# Altium PCB CX1086_PCB1.PcbDoc
Units mil, origin at the board's own origin, x right, y up, seen from the top; angles counter-clockwise.
Board outline 2746.03 x 2461.03 mil, 2 copper layers (Top Layer, Bottom Layer); 10 components, 9 nets, 30 pads, 0 vias.
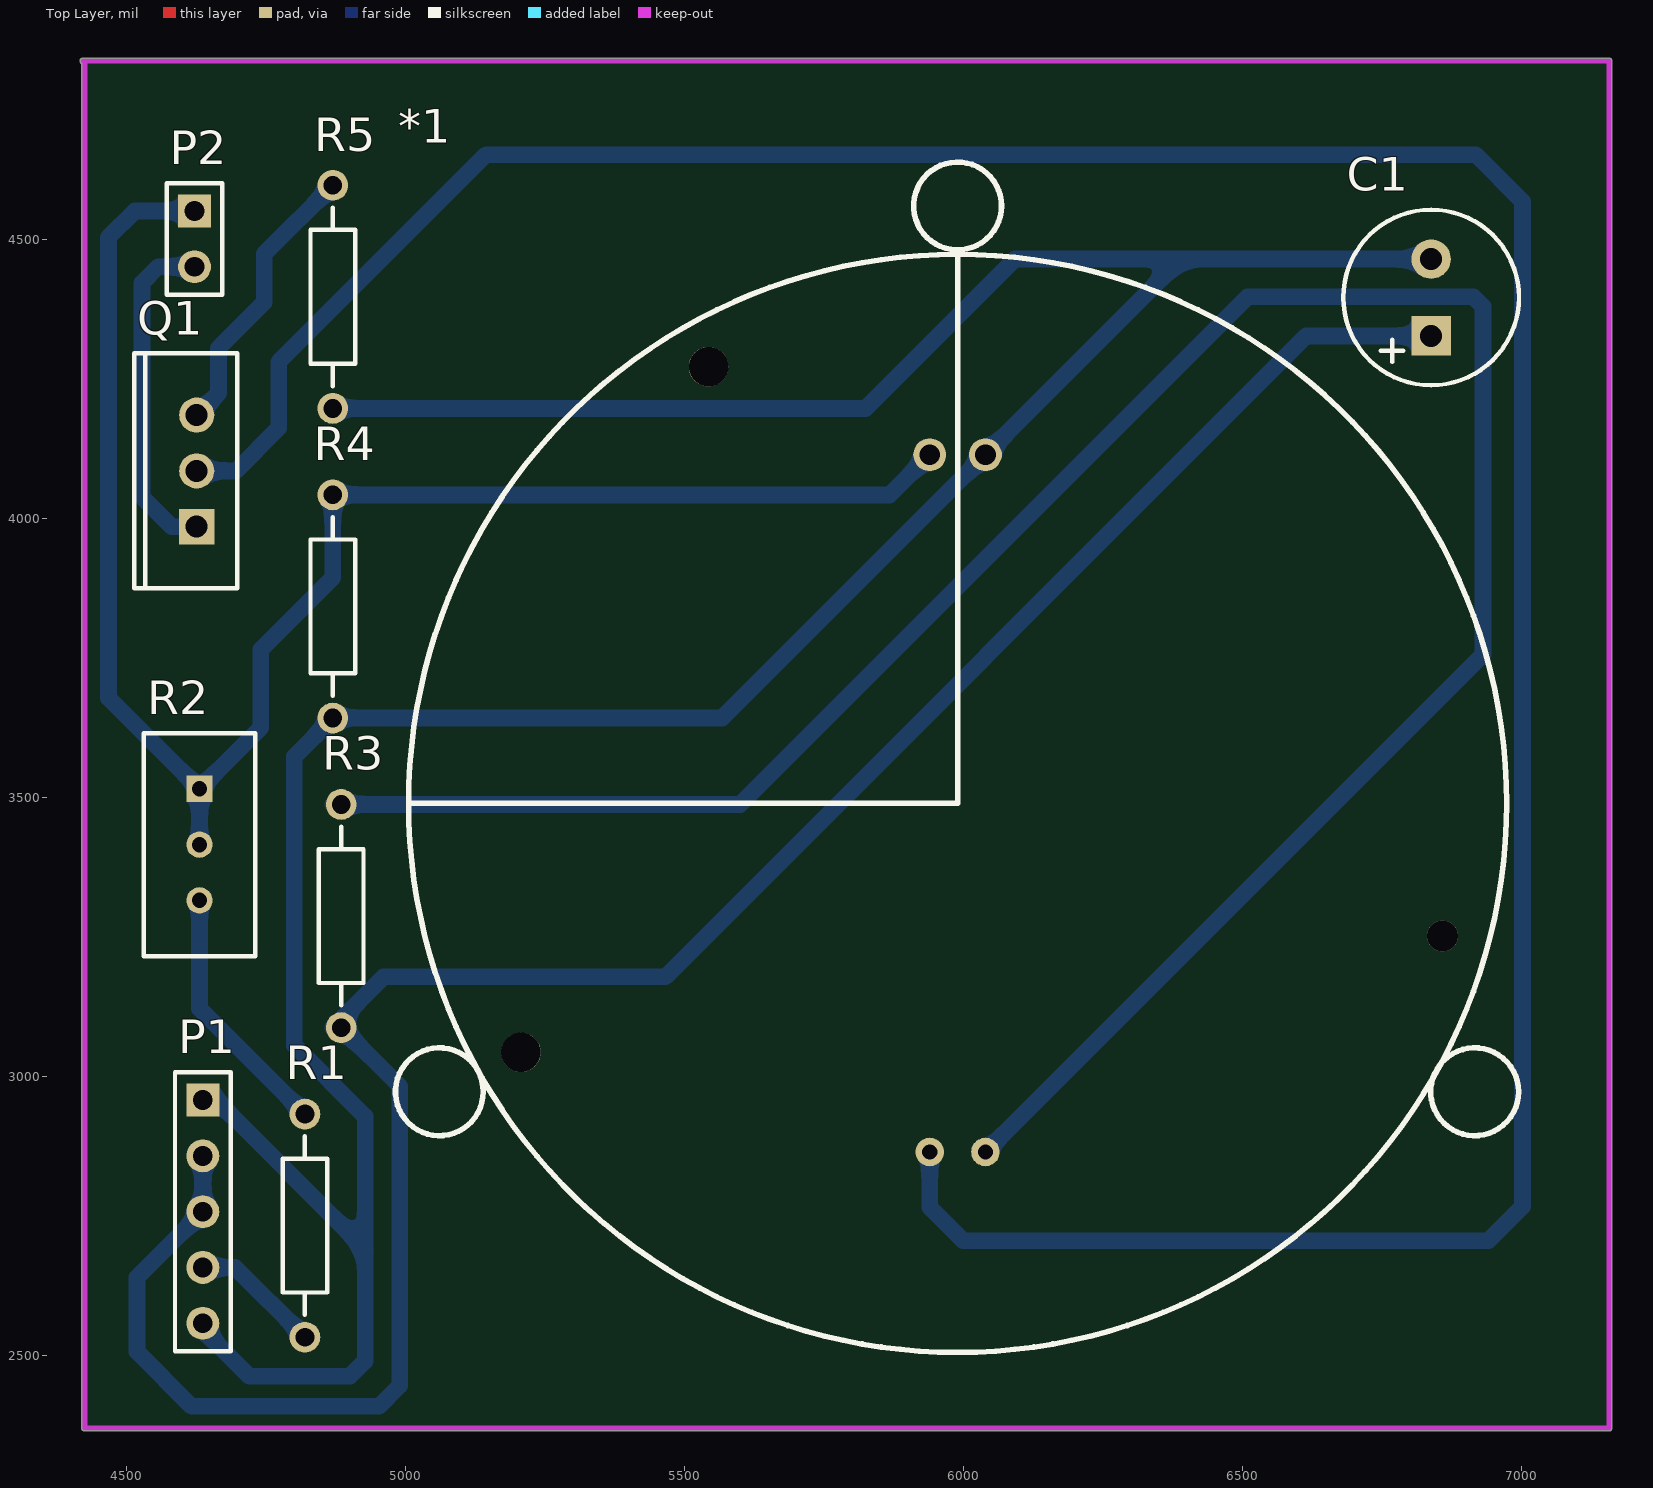
[diagram p0: Top Layer view]
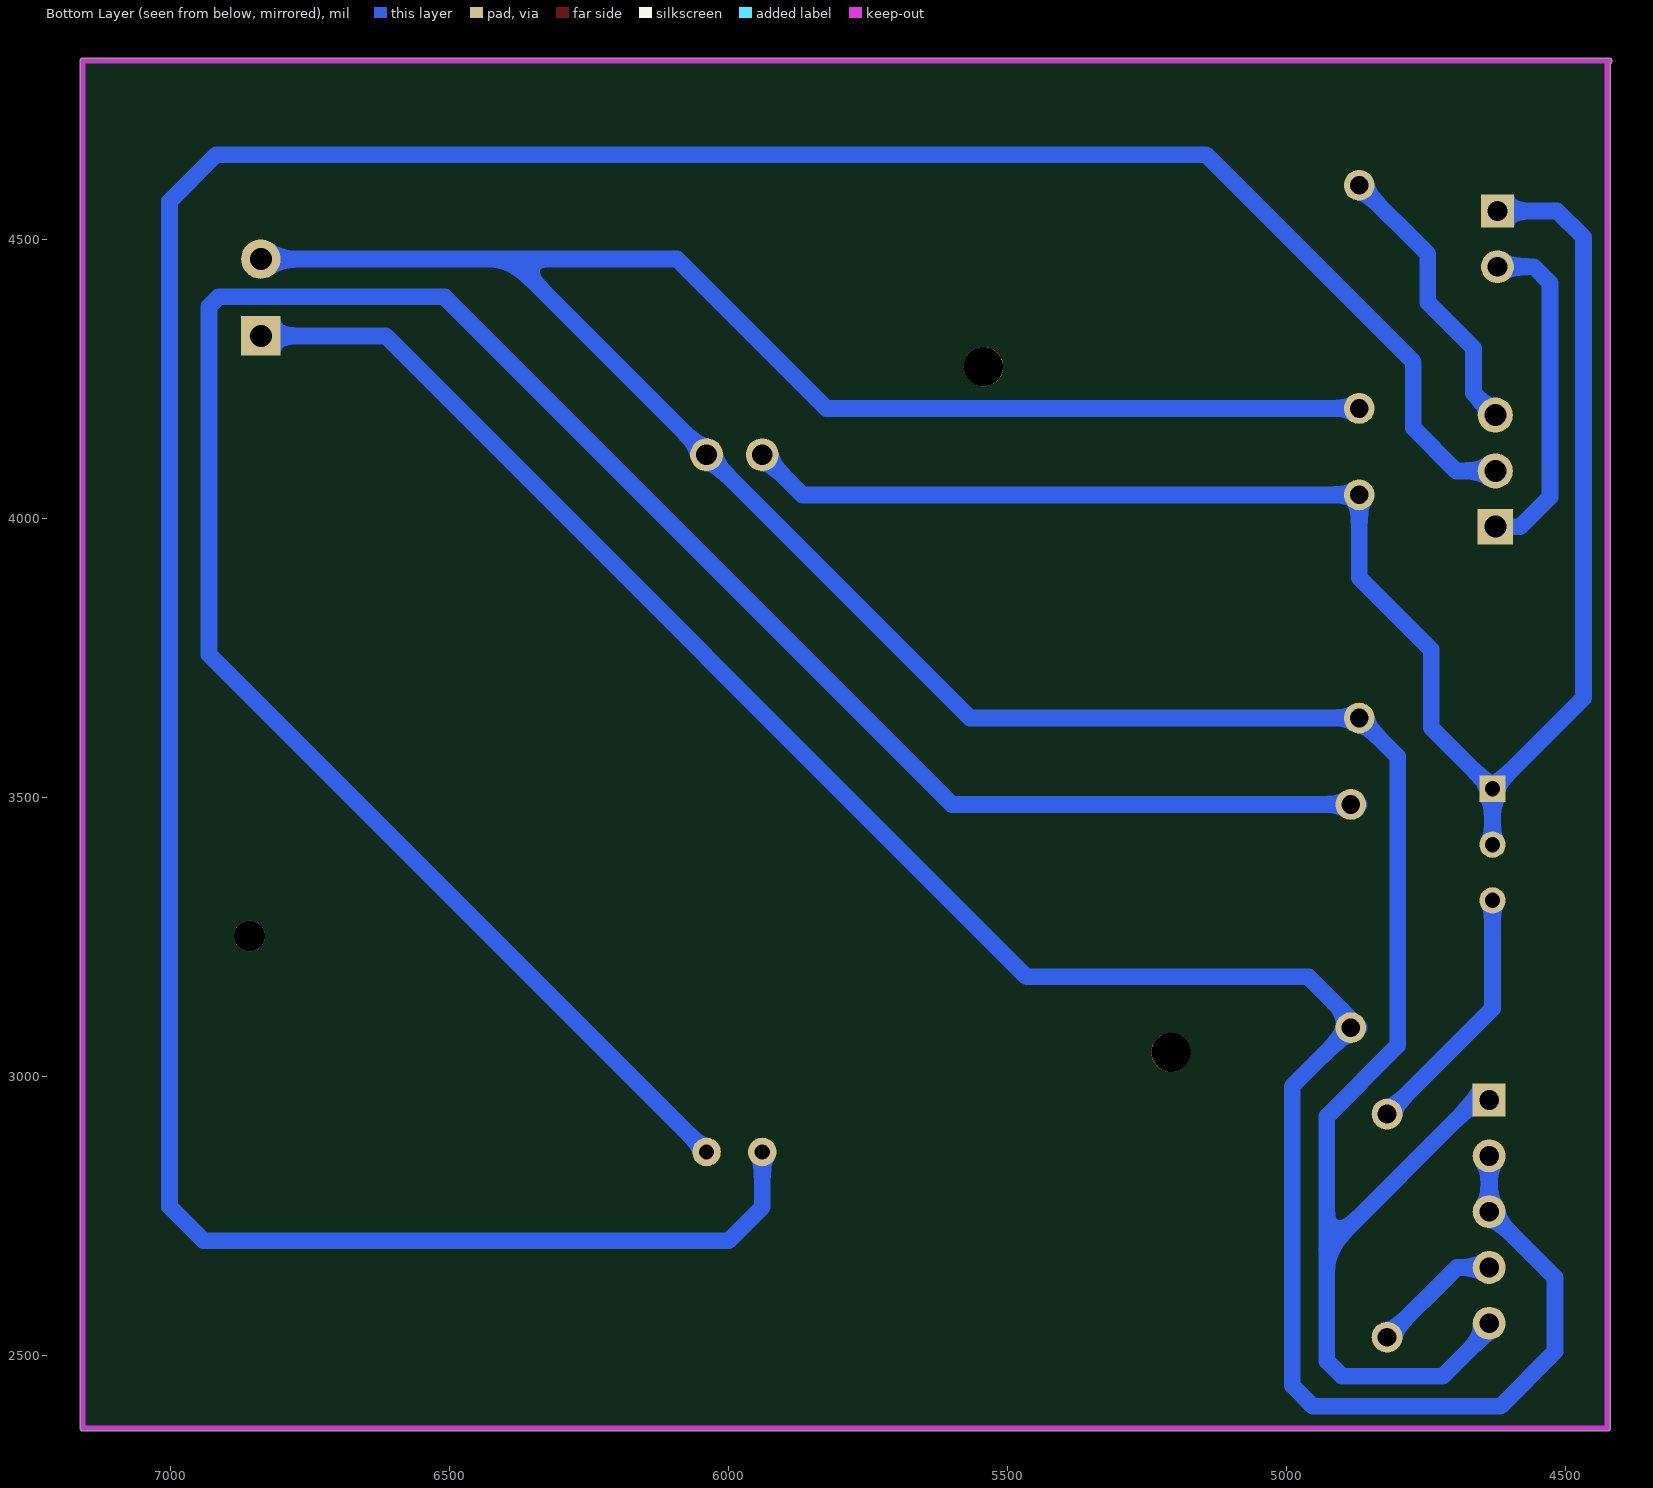
[diagram p1: Bottom Layer view, seen from below]

## Layer stack, top to bottom
Top Solder: solder mask 0.4, Solder Resist, Dk 3.5
Top Layer: signal copper 1.4
Dielectric 1: dielectric 12.6, FR-4, Dk 4.8
Bottom Layer: signal copper 1.4
Bottom Solder: solder mask 0.4, Solder Resist, Dk 3.5

## Board outline
4418.98,2369 4418.98,4815.41 cw(c4421,4820) 4421,4825.02 7157,4825.02 cw(c7157,4820) 7162.02,4820 7162.02,2369 cw(c7157,2369) 7157,2363.99 4424,2363.99 cw(c4424,2369)

## Design rules (kind name [scope] priority, off if disabled: settings)
Clearance [All] p1: gap=10
ComponentClearance [All] p1: gap=0 collisioncheckmode=3 verticalgap=0 showdistances=TRUE
PolygonConnect [All] p1: connectstyle=Relief reliefconductorwidth=10 reliefentries=4 polygonreliefangle="90 Angle" airgapwidth=10
RoutingVias [All] p1: holewidth=28 width=50 viastyle="Through Hole" minholewidth=28 minwidth=50 maxholewidth=28 maxwidth=50
SolderMaskExpansion [All] p1: expansion=4
Width [All] p1: maxlimit=100 minlimit=10 preferedwidth=20
29 further rules are at their usual default settings.

## Components (designator, comment, footprint, x,y, rotation, side; value= is the part's Value field where it differs from the comment)
*1 "CX-1088" CX-1088 5060,2972 r90 top
C1 "Cap Pol" C-RB-8 6838,4327 r90 top
P1 "Header 5" HDR1X5 4636,2957 r270 top
P2 "Header 2" HDR1X2 4621,4551 r270 top
Q1 "MOSFET-N" TO-220AB 4625,4085 r90 top
R1 "Res2" AXIAL-0.4 4819,2732 r270 top
R2 "RES-RPot" VR_A1 4630,3415 r270 top
R3 "Res2" AXIAL-0.4 4884,3287 r270 top
R4 "Res2" AXIAL-0.4 4869,3842 r90 top
R5 "Res2" AXIAL-0.4 4869,4397 r90 top

## Footprints (in the part's own frame and the unit in brackets; to place one, negate y for a bottom-side part, rotate by r counter-clockwise, add the part's x,y. Pads: shape width x height; smd on the part's side, far side on the other; paste and mask are expansions set on the pad)
AXIAL-0.4 [mm] "Axial Device, Thru-Hole; 2 Leads; 0.4 in Pin Spacing"
  round 1.4 hole 0.85: 1(-5.08,0) 2(5.08,0)
  silkscreen extent -4.06,-1.02 4.06,1.02
C-RB-8 [mm] "35V 220UF电容"
  rect 1.8x1.8 hole 1: 1(0,0)
  round 1.8 hole 1: 2(3.5,0)
  silkscreen extent -2.25,-4 5.75,4
CX-1088 [mm] "光电式烟雾传感器"
  round 1.5 hole 0.94: 1(29.007,-22.327) 2(29.007,-24.867)
  round 1.3 hole 0.7: 3(-2.743,-24.867) 4(-2.743,-22.327)
  round 1.8 hole 1.8: ""(1.792,-3.717) ""(33.012,-12.257)
  round 1.41 hole 1.41: ""(7.092,-45.677)
  silkscreen extent -11.87,-49.14 42.33,2, body extent -11.84,-48.59 38.13,1.4, height 16.5
HDR1X2 [mm] "Connector; Header; 2 Position"
  rect 1.5x1.5 hole 0.9: 1(0,0)
  round 1.5 hole 0.9: 2(2.54,0)
  silkscreen extent -1.27,-1.27 3.81,1.27
HDR1X5 [mm] "Connector; Header; 5 Position"
  rect 1.5x1.5 hole 0.9: 1(0,0)
  round 1.5 hole 0.9: 2(2.54,0) 3(5.08,0) 4(7.62,0) 5(10.16,0)
  silkscreen extent -1.27,-1.27 11.43,1.27
TO-220AB [mm] "TO, Thru-Hole, Vertical, Heatsink Mounted; 3 In-Line Leads; Pitch 2.54 mm"
  round 1.6 hole 1: D(0,0) S(2.54,0)
  rect 1.6x1.6 hole 1: G(-2.54,0)
  silkscreen extent -5.35,-1.85 5.35,2.85, body extent -5.33,-1.78 5.33,2.79, height 4
VR_A1 [mm] "Potentiometer; 3 Leads"
  rect 1.2x1.2 hole 0.7: 1(-2.54,0)
  round 1.2 hole 0.7: 2(0,0) 3(2.54,0)
  silkscreen extent -5.08,-2.54 5.08,2.54, body extent -5.08,-2.54 5.08,2.54, height 10.5

## Part data
C1: "极性电解电容"
P1: "Header, 5-Pin"
P2: "Header, 2-Pin"
Q1: "N-Channel MOSFET"
R1 R3 R4 R5: "Resistor"
R2: "精密可调电阻"

## Nets (pads, with @x,y where several pads share a name; then routed paths per layer and width w, separated by ;. In a path a pad name is that pad's centre, name@x,y a point inside that pad or via, vN(x,y) a via of type N, cw(c..) or ccw(c..) an arc to the next point about the centre after c; other vN are vias at no path point)
5V: P1.4 R1.2 | length 234.8
  Bottom Layer w30: P1.4 4694,2657 R1.2
9V: C1.1 P1.2 P1.3 R3.2 | length 4105.5
  Bottom Layer w30: P1.2 P1.3 4518,2639 4518,2506 4616,2408 4952,2408 4989,2445 4989,2982 R3.2 ; R3.2@4876.5,3079.5 4869,3087 4960,3178 5465,3178 6614,4327 C1.1
GND: *1.2 C1.2 P1.1 P1.5 R4.1 R5.1 | length 5935.9
  Bottom Layer w30: P1.1 4660,2957 4927,2690 ; P1.5@4646,2557 P1.5 4636,2545 4719,2462 4900,2462 4927,2489 4927,2690 ; R5.1 5824,4197 6091.8,4464.8 6389.8,4464.8 ; C1.2 6389.8,4464.8 ; 4927,2690 4927,2928 4800,3055 4800,3573 R4.1 5567,3642 *1.2 6389.8,4464.8
Net*1_1: *1.1 P2.1 R2.1 R2.2 R4.2 | length 3055.8
  Bottom Layer w30: P2.1 4514,4551 4467,4504 4467,3678 R2.1 ; R2.2 R2.1 ; *1.1 5867,4042 R4.2 4869,3894 4740,3765 4740,3625 R2.1
Net*1_3: *1.3 R3.1 | length 4331.5
  Bottom Layer w30: R3.1@4869,3487 5599,3487 6509,4397 6914,4397 6931,4380 6931,3756 *1.3
Net*1_4: *1.4 Q1.D | length 5729.9
  Bottom Layer w30: Q1.D 4695,4085 4772,4162 4772,4280 5144,4652 6918,4652 7002,4568 7002,2766 6941,2705 5999,2705 5939,2765 *1.4
NetP2_2: P2.2 Q1.G | length 610
  Bottom Layer w30: P2.2 4556,4451 4527,4422 4527,4038 4580,3985 Q1.G
NetQ1_S: Q1.S R5.2 | length 513.1
  Bottom Layer w30: Q1.S 4664,4224 4664,4305 4746,4387 4746,4474 R5.2
NetR1_1: R1.1 R2.3 | length 461.3
  Bottom Layer w30: R2.3 4630,3121 R1.1
pads on no net: *1.

## Keep-outs
Keep-Out Layer:
  lines w10: 4421,4820 7157,4820 7157,2369 4424,2369 4424,4820